# EAGLE board cw-twostage-standard (EAGLE 9.4.1)
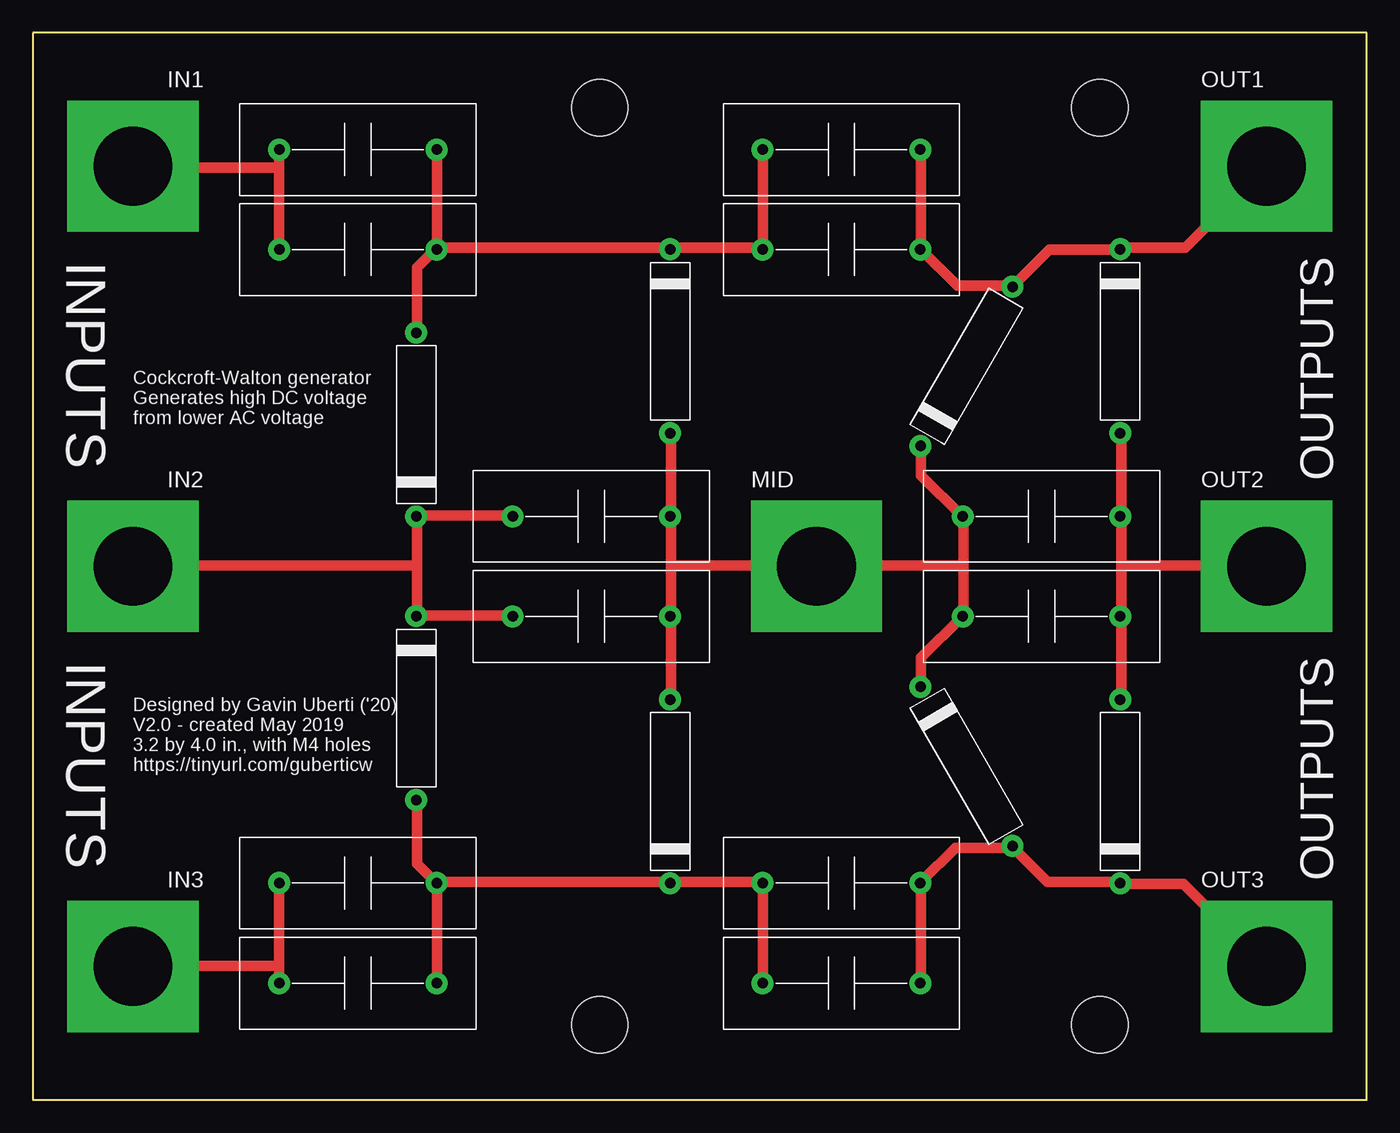
[diagram p0: board, top side]

Size 101.6 x 81.28 mm. Coordinates in mm from the lower left corner, seen from the top.
Outline: 0,0 101.6,0 101.6,81.28 0,81.28 0,0
Copper layers (1*16): Top 0.035mm / dielectric 1.5mm / Bottom 0.035mm
Design rules "default": minimum track width 6mil, minimum drill 0.35mm, track to track 6mil, track to pad 6mil, pad to pad 6mil, via to via 6mil, smd to smd 6mil, copper to edge 40mil, drill to drill 6mil, minimum pad ring 10mil, minimum via ring 8mil, stop-mask expansion 4mil, vias tented up to drill 0mil, thermal gap 10mil
Holes 4.3 mm at 43.18,75.56 81.28,75.56 81.28,5.71 43.18,5.71

## Footprints (pad centres in the part's own frame; a part is rotated, then mirrored left to right if it is on the bottom)
CAP_CT81_12 = drill 0.8 pad 1.676: P$1 -6,0; P$2 6,0
DIODE_14 = drill 0.8 pad 1.676: P$1 -7,0; P$2 7,0
LUG_SQUARE_M6 = drill 6 pad 10 square: P$1 0,0

## Placement (x,y rotation side)
C1  2.2 nF  [CAP_CT81_12]  24.77,64.77 0 top
C2  2.2 nF  [CAP_CT81_12]  61.59,64.77 0 top
C3  2.2 nF  [CAP_CT81_12]  61.59,16.51 0 top
C4  2.2 nF  [CAP_CT81_12]  42.55,44.45 0 top
C5  2.2 nF  [CAP_CT81_12]  24.77,8.89 0 top
C6  2.2 nF  [CAP_CT81_12]  76.83,36.83 0 top
C7  2.2 nF  [CAP_CT81_12]  61.59,72.39 0 top
C8  2.2 nF  [CAP_CT81_12]  24.77,72.39 0 top
C9  2.2 nF  [CAP_CT81_12]  61.59,8.89 0 top
C10  2.2 nF  [CAP_CT81_12]  24.77,16.51 0 top
C11  2.2 nF  [CAP_CT81_12]  76.83,44.45 0 top
C12  2.2 nF  [CAP_CT81_12]  42.55,36.83 0 top
D1  DIODE_14MM  [DIODE_14]  29.21,29.84 90 top
D2  DIODE_14MM  [DIODE_14]  71.12,25.4 120 top
D3  DIODE_14MM  [DIODE_14]  29.21,51.44 270 top
D4  DIODE_14MM  [DIODE_14]  71.12,55.88 240 top
D5  DIODE_14MM  [DIODE_14]  82.83,57.78 90 top
D6  DIODE_14MM  [DIODE_14]  48.55,57.78 90 top
D7  DIODE_14MM  [DIODE_14]  48.55,23.5 270 top
D8  DIODE_14MM  [DIODE_14]  82.83,23.5 270 top
IN1  TERMINAL_M6  [LUG_SQUARE_M6]  7.62,71.12 0 top
IN2  TERMINAL_M6  [LUG_SQUARE_M6]  7.62,40.64 0 top
IN3  TERMINAL_M6  [LUG_SQUARE_M6]  7.62,10.16 0 top
MID  TERMINAL_M6  [LUG_SQUARE_M6]  59.69,40.64 0 top
OUT1  TERMINAL_M6  [LUG_SQUARE_M6]  93.98,71.12 0 top
OUT2  TERMINAL_M6  [LUG_SQUARE_M6]  93.98,40.64 0 top
OUT3  TERMINAL_M6  [LUG_SQUARE_M6]  93.98,10.16 0 top

## Library data of the parts
C1-C12 D1-D8 IN1-IN3 MID OUT1-OUT3 = cwParts

## Nets
N$1: C5.P$1 C10.P$1 IN3.P$1
N$3: C4.P$2 C6.P$1 C11.P$1 C12.P$2 D2.P$2 D4.P$2 D6.P$1 D7.P$1 MID.P$1
N$4: C1.P$1 C8.P$1 IN1.P$1
N$5: C6.P$2 C11.P$2 D5.P$1 D8.P$1 OUT2.P$1
N$6: C3.P$1 C5.P$2 C9.P$1 C10.P$2 D1.P$1 D7.P$2
N$7: C1.P$2 C2.P$1 C7.P$1 C8.P$2 D3.P$1 D6.P$2
N$8: C3.P$2 C9.P$2 D2.P$1 D8.P$2 OUT3.P$1
N$10: C4.P$1 C12.P$1 D1.P$2 D3.P$2 IN2.P$1
N$11: C2.P$2 C7.P$2 D4.P$1 D5.P$2 OUT1.P$1

## Tracks (layer width: path | path; a pad name or v marks a point on that pad's centre or on a via)
N$1
  Top 0.152: 7.62,10.21 IN3.P$1
  Top 0.813: 18.75,10.21 18.75,16.46 C10.P$1 | 18.75,10.21 18.75,8.99 C5.P$1 | 7.62,10.21 18.75,10.21
N$3
  Top 0.152: 70.71,44.5 C11.P$1 | 48.62,36.73 C12.P$2 48.62,36.88 | 59.59,40.69 MID.P$1 59.74,40.69
  Top 0.813: 70.71,44.5 67.67,47.55 67.67,49.68 D4.P$2 | D2.P$2 67.67,31.55 67.67,33.68 70.71,36.73 C6.P$1 70.87,36.88 70.87,40.69 | 70.87,40.69 70.87,44.35 C11.P$1 | 48.62,36.73 48.62,30.63 D7.P$1 | 48.62,44.5 C4.P$2 | 48.62,40.69 48.62,44.35 C4.P$2 | 48.62,40.69 48.62,36.88 | 59.59,40.69 48.62,40.69 | 59.74,40.69 70.87,40.69 | D6.P$1 48.62,50.75 48.62,44.81 C4.P$2
N$4
  Top 0.152: 7.62,71.02 IN1.P$1
  Top 0.813: 18.75,71.02 18.75,64.77 C1.P$1 | 7.62,71.02 18.75,71.02 | 18.75,71.02 18.75,72.39 C8.P$1
N$5
  Top 0.152: 82.91,30.63 D8.P$1 | 82.91,36.73 C6.P$2 82.91,36.88 | 82.91,44.35 C11.P$2 | 93.88,40.69 OUT2.P$1
  Top 0.813: 82.91,36.73 82.91,30.63 | D5.P$1 82.91,50.75 82.91,44.5 C11.P$2 | 82.91,44.35 82.91,40.69 | 82.91,40.69 82.91,36.88 | 93.88,40.69 82.91,40.69
N$6
  Top 0.152: 48.62,16.61 D7.P$2 | 55.47,16.61 C3.P$1 | 30.79,16.61 C10.P$2
  Top 0.813: C9.P$1 55.63,8.99 55.63,16.46 C3.P$1 | 55.47,16.61 48.62,16.61 | C5.P$2 30.79,8.99 30.79,16.46 C10.P$2 30.63,16.61 29.26,17.98 29.26,22.71 D1.P$1 | 30.79,16.61 48.46,16.61 D7.P$2
N$7
  Top 0.152: 55.63,72.39 C7.P$1 | 55.63,64.77 C2.P$1 55.32,64.92 | 29.26,58.52 D3.P$1 | 30.79,64.77 C1.P$2 | 30.79,64.92 C1.P$2 | 30.79,72.39 C8.P$2 | 30.79,65.23 C1.P$2 | 48.62,64.92 D6.P$2 | 31.09,64.92 C1.P$2
  Top 0.813: 55.63,64.77 55.63,72.39 | 29.26,58.52 29.26,63.4 30.63,64.77 C1.P$2 | 30.79,64.77 30.79,64.92 | 30.79,65.23 30.79,72.39 | 55.32,64.92 48.62,64.92 | 31.09,64.92 48.46,64.92 D6.P$2
N$8
  Top 0.152: 67.67,16.46 C3.P$2 67.67,16.61 | 74.52,19.2 D2.P$1 | 82.75,16.61 D8.P$2 | 93.88,10.21 OUT3.P$1
  Top 0.813: 67.67,16.46 67.67,8.99 C9.P$2 | 74.52,19.2 70.26,19.2 67.67,16.61 | 82.75,16.61 77.27,16.61 74.68,19.2 D2.P$1 | 93.88,10.21 87.63,16.46 82.91,16.46 D8.P$2
N$10
  Top 0.152: 29.26,44.5 D3.P$2 29.26,44.35 | 29.26,36.88 D1.P$2 | 7.62,40.69 IN2.P$1
  Top 0.813: C12.P$1 36.42,36.88 29.26,36.88 29.26,40.69 | 29.26,44.5 36.42,44.5 C4.P$1 | 29.26,44.35 29.26,40.69 | 7.62,40.69 29.26,40.69
N$11
  Top 0.152: 67.67,72.39 C7.P$2 | 82.75,64.77 D5.P$2
  Top 0.813: 67.67,72.39 67.67,64.77 | 67.67,64.77 70.41,62.03 74.52,62.03 D4.P$1 74.68,62.03 77.42,64.77 82.75,64.77 | 67.67,64.77 C2.P$2 | OUT1.P$1 87.78,64.92 82.91,64.92 D5.P$2

## Text on the board
tNames: INPUTS | Cockcroft-Walton generator / Generates high DC voltage / from lower AC voltage | OUTPUTS | INPUTS | Designed by Gavin Uberti ('20) / V2.0 - created May 2019 / 3.2 by 4.0 in., with M4 holes / https://tinyurl.com/guberticw | OUTPUTS
Holes: Holes are 1.5 in. apart horizontally, / and 2.75 in. apart vertically